# Altium PCB FCM_Integrated.PcbDoc (part 3 of 3)
Units mil, origin at the board's own origin, x right, y up, seen from the top; angles counter-clockwise.
Board outline 5445 x 4366 mil, 4 copper layers (Top Layer, Power, Ground, Bottom Layer), stack 23.756 mil thick; 165 components, 92 nets, 629 pads, 170 vias.
Unrouted connection lines stored in the file: 134.
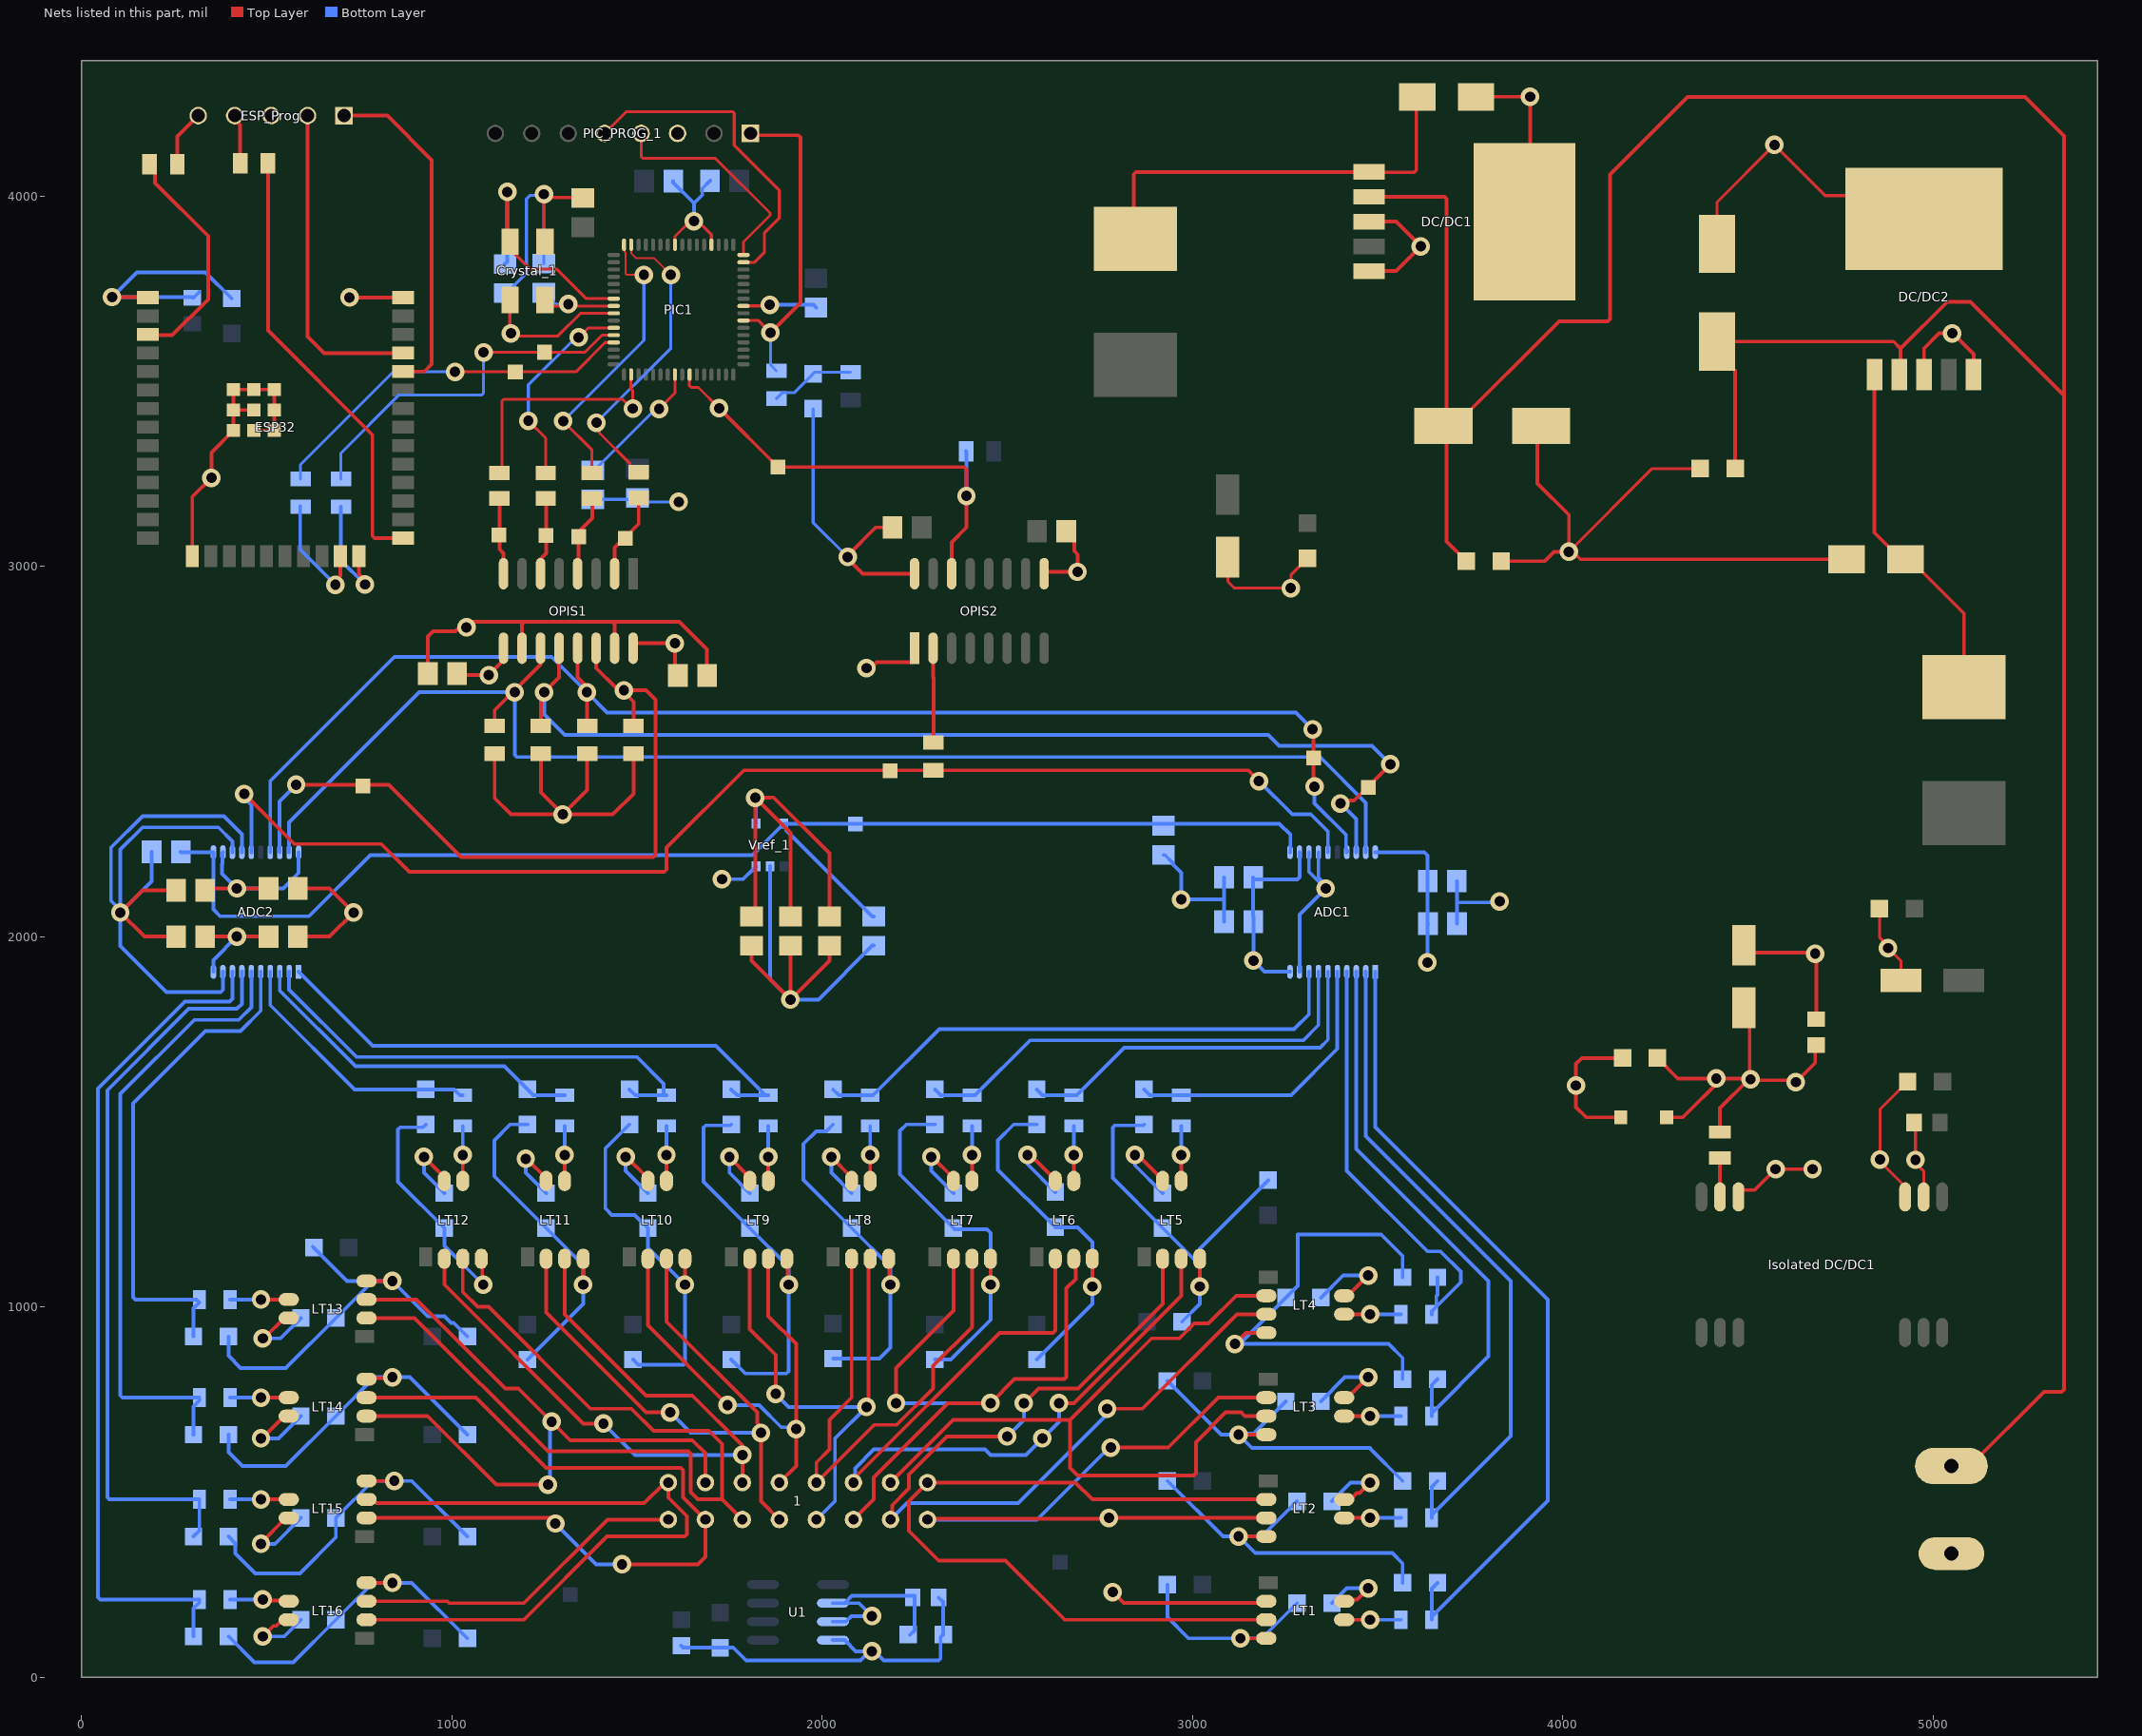
[diagram p4: the nets of this part, all layers, seen from the top]

## Via types
v1: diameter 50, hole 28, Top Layer to Bottom Layer, 170 vias

## Nets (pads, with @x,y where several pads share a name; then routed paths per layer and width w, separated by ;. In a path a pad name is that pad's centre, name@x,y a point inside that pad or via, vN(x,y) a via of type N, cw(c..) or ccw(c..) an arc to the next point about the centre after c; other vN are vias at no path point) (continued)
+5: *1.1 ADC1.10 ADC1.12 ADC1.20 ADC2.10 ADC2.12 ADC2.20 C1.1 C2.1 C3.2 C4.2 C5.2 C6.2 C10.1 C12.2 C13.2 C14.1 C15.1 C16.2 C17.2 C18.1 C19.1 C23.2 C26.2 C29.2 C32.2 C35.2 C38.2 C41.2 C44.2 C47.2 C49.2 C53.2 C55.2 C59.2 C61.2 C65.2 C67.2 C76.1 C77.1 C78.2 DIODE2.K LT1.7 LT2.7 LT3.7 LT4.7 LT5.7 LT6.7 LT7.7 LT8.7 LT9.7 LT10.7 LT11.7 LT12.7 LT13.7 LT14.7 LT15.7 LT16.7 OPIS1.10 OPIS1.15 OPIS2.1 R5.1 R6.1 R7.1 R8.1 U1.2 U1.3 Vref_1.3 Vref_1.4 | length 10591.2
  Top Layer w10: C15.1@334.37,2000 v1(420,2000) C17.2@505.63,2000 ; C14.1@334.37,2125 339.37,2130 v1(420,2130) C16.2@505.63,2130 ; v1(485,360) 485,362.53 552.47,430 LT15.7@560,430 ; v1(485,645) 487.47,645 547.47,705 LT14.7@560,705 ; v1(490,110) 518.28,138.28 526.46,138.28 543.18,155 LT16.7@560,155 ; v1(490,915) 492.47,915 547.47,970 LT13.7@560,970 ; v1(925,1405) 980,1350.03 LT12.7@980,1340 ; C6.2@935.63,2710 935.63,2810.63 950,2825 1010,2825 1035,2850 1195.86,2850 ; R5.1@1116,2494 1116,2374 1160,2330 v1(1300,2330) ; OPIS1.10@1190,2765 1190,2844.14 1195.86,2850 ; v1(1200,1400) 1202.53,1400 1255,1347.53 LT11.7@1255,1340 ; R6.1@1241,2494 1241,2389 v1(1300,2330) ; R7.1@1366,2494 1366,2396 v1(1300,2330) ; OPIS1.15@1440,2765 1440,2844.14 1434.14,2850 ; v1(1470,1405) 1472.53,1405 1530,1347.53 LT10.7@1530,1340 ; R8.1@1491,2494 1491,2386 1435,2330 v1(1300,2330) ; C5.2@1689.37,2705 1689.37,2775.63 1615,2850 1434.14,2850 ; v1(1750,1405) 1805,1350.03 LT9.7@1805,1340 ; C13.2@1810,2054.37 1820,2064.37 v1(1820,2375) ; C10.1@1915,2054.37 1915,2280 v1(1820,2375) ; C12.2@2020,2054.37 2020,2225 1869.14,2375.86 1860.86,2375.86 1860,2375 v1(1820,2375) ; v1(2025,1405) 2080,1350.03 LT8.7@2080,1340 ; v1(2120,2725) 2130.82,2725 2147.12,2741.3 2242.4,2741.3 2250,2748.9 OPIS2.1@2250,2778.82 ; v1(2295,1405) 2297.53,1405 2355,1347.53 LT7.7@2355,1340 ; v1(2555,1410) 2563.29,1410 2630,1343.29 LT6.7@2630,1340 ; v1(2845,1410) 2853.29,1410 2920,1343.29 LT5.7@2920,1340 ; LT1.7@3410,205 3414.78,209.78 3444.78,209.78 v1(3475,240) ; LT2.7@3410,480 3426.82,480 3443.54,496.72 3451.72,496.72 v1(3480,525) ; LT3.7@3410,755 3420.03,755 v1(3475,810) ; LT4.7@3410,1030 3420.03,1030 v1(3475,1085) ; C78.2@4256.18,1672 4311.18,1617 v1@4430,1617 ; DIODE2.K@4280.94,1512 4325,1512 v1@4430,1617 ; *1.1@4425,1472 4425,1537 v1@4505,1617 ; C77.1@4490,1807.35 4505,1792.36 v1@4505,1617 ; C76.1@4685,1707 4682.05,1704.05 4682.05,1659.05 v1(4630,1607) 4625,1612 4510,1612 v1@4505,1617 ; 1195.86,2850 1434.14,2850 ; v1@4430,1617 v1@4505,1617
  Bottom Layer w10: ADC2.10@356.46,1905 356.46,1936.46 v1(420,2000) ; ADC2.12@382.05,2227.83 381.1,2226.88 381.1,2196.1 380,2195 380,2170 v1(420,2130) 545,2130 586.77,2171.77 ADC2.20@586.77,2227.83 ; v1(485,360) 522.76,360 C61.2@592.76,430 ; v1(485,645) 532.76,645 C55.2@592.76,705 ; v1(490,110) 547.76,110 C67.2@592.76,155 ; v1(490,915) 537.76,915 C49.2@592.76,970 ; v1(925,1405) 925,1362.24 C65.2@980,1307.24 ; v1(1200,1400) 1200,1362.24 C59.2@1255,1307.24 ; v1(1470,1405) 1470,1367.24 C53.2@1530,1307.24 ; v1(1730,2155) 1787,2155 1813.22,2181.22 1815.19,2181.22 1822,2188.03 Vref_1.3@1822,2190 ; v1(1750,1405) 1750,1362.24 C47.2@1805,1307.24 ; v1(1820,2375) 1821,2374 1821,2306 Vref_1.4@1822,2305 ; v1(2025,1405) 2025,1362.24 C44.2@2080,1307.24 ; U1.3@2029.49,150 2064.67,150 2079.67,165 v1(2135,165) 2100,200 U1.2@2060.98,200 ; U1.2@2029.49,200 U1.2@2060.98,200 ; C19.1@2237.76,114.03 2250,126.27 2250,220 2080.98,220 U1.2@2060.98,200 ; v1(2295,1405) 2295,1367.24 C41.2@2355,1307.24 ; v1(2555,1410) 2555,1385 C38.2@2630,1310 ; v1(2845,1410) 2845,1382.24 C35.2@2920,1307.24 ; ADC1.10@3263.82,1905 3251.91,1905 ; ADC1.12@3289.41,2227.83 3289.41,2160.77 3283.55,2154.91 3200.09,2154.91 3184.77,2154.91 3169.46,2154.91 C4.2@3164.37,2160 3164.37,2055 3165,2054.37 v1(3165,1935) 3195,1905 3240,1905 ; C29.2@3347.24,745 3412.24,810 v1(3475,810) ; C32.2@3347.24,1025 3407.24,1085 v1(3475,1085) ; C23.2@3377.24,200 3417.24,240 v1(3475,240) ; C26.2@3377.24,475 3427.24,525 v1(3480,525) ; ADC1.20@3494.13,2227.83 3626.94,2227.83 3635.63,2219.14 C3.2@3635.63,2150 3635.63,2035.63 C1.1@3636.26,2035 3635,2033.74 v1(3635,1930) ; 3240,1905 3251.91,1905 ; 3240,1905 3251.91,1905
  other v1: 4507.5,1614.5 4415,1617 1040,2835
+12: C70.2 C71.1 C79.2 C80.1 DC/DC1.2 DC/DC2.2 J1.1 | length 8846.9
  Top Layer w10: DC/DC1.2@3477,3997.86 3681.14,3997.86 3687,3992 3687,3387.78 C71.1@3678.22,3379 ; C70.2@3739.76,3014 3687,3066.76 3687,3370.22 C71.1@3678.22,3379 ; C79.2@4466.24,3264 4466.24,3528.26 4417,3577.5 C80.1@4417,3607 4894,3607 4913,3588 ; DC/DC2.2@4909.07,3517.92 4913,3521.85 4913,3588 ; J1.1@5050,570.22 5099.21,570.22 5299.99,771 5348.14,771 5354,776.86 5354,3461 ; C71.1@3678.22,3379 3707.72,3379 3990.72,3662 4122.14,3662 4128,3667.86 4128,4058 4337,4267 5249,4267 5354,4162 5354,3461 ; 4913,3588 5039,3714 5101,3714 5354,3461
CathH1: OPIS1.2 pad.1@1469,3075 R4.1 | length 245.7
  Top Layer w10: OPIS1.2@1440,2966.18 1440,3050 1505,3115 R4.1@1505,3185
CathH2: OPIS1.4 pad.1@1343,3080 R3.1 | length 233.7
  Top Layer w10: OPIS1.4@1340,2966.18 1342.91,2969.09 1342.91,3092.91 1380,3130 1380,3181.85 R3.1@1378.94,3182.91
CathH3: OPIS1.6 pad.1@1255,3083 R2.1 | length 223.4
  Top Layer w10: OPIS1.6@1240,2966.18 1240,3020 1255,3035 1255,3181.85 R2.1@1253.94,3182.91
CathH4: OPIS1.8 pad.1@1128,3084 R1.1 | length 221.3
  Top Layer w10: R1.1@1128.94,3182.91 1128.94,3046.06 1140,3035 OPIS1.8@1140,2966.18
CathL1: OPIS2.2 R11.2 | length 255.2
  Top Layer w10: OPIS2.2@2300,2778.82 2300,2700 2301,2699 R11.2@2301,2524
Cell_1_Voltage: ADC1.1 C24.2 R16.2 | length 2171.6
  Bottom Layer w10: ADC1.1@3494.13,1905 3494.13,1485.87 3960,1020 3960,476.54 R16.2@3646.34,162.87 ; R16.2@3646.34,155 R16.2@3646.34,162.87 ; C24.2@3662.24,255 3646.34,239.09 R16.2@3646.34,162.87
Cell_2_Voltage: ADC1.2 C27.2 R17.2 | length 1824.4
  Bottom Layer w10: ADC1.2@3468.54,1905 3468.54,1461.46 3860,1070 3860,651.54 R17.2@3646.34,437.87 ; R17.2@3646.34,430 R17.2@3646.34,437.87 ; C27.2@3662.24,530 3646.34,514.09 R17.2@3646.34,437.87
Cell_3_Voltage: ADC1.3 C30.2 R18.2 | length 1510.3
  Bottom Layer w10: ADC1.3@3442.95,1905 3442.95,1427.05 3800,1070 3800,866.54 R18.2@3646.34,712.87 ; R18.2@3646.34,705 R18.2@3646.34,712.87 ; C30.2@3662.24,805 3646.34,789.09 R18.2@3646.34,712.87
Cell_4_Voltage: ADC1.4 C33.2 R19.2 | length 1186.2
  Bottom Layer w10: ADC1.4@3417.36,1905 3417.36,1367.64 3635,1150 3670,1150 3725,1095 3725,1066.54 R19.2@3659.05,1000.59 ; R19.2@3646.34,980 3646.34,987.87 R19.2@3659.05,1000.59 ; C33.2@3662.24,1080 3662.24,1032.58 3659.05,1029.39 R19.2@3659.05,1000.59
Cell_5_Voltage: ADC1.5 C36.2 R20.2 | length 788.5
  Bottom Layer w10: C36.2@2870,1587.24 2885.91,1571.34 R20.2@2970,1571.34 3266.34,1571.34 3391.77,1696.77 ADC1.5@3391.77,1905
Cell_6_Voltage: ADC1.6 C39.2 R21.2 | length 1038.7
  Bottom Layer w10: C39.2@2580,1587.24 2595.91,1571.34 R21.2@2680,1571.34 2687.87,1571.34 2816.54,1700 3345,1700 3366.18,1721.18 ADC1.6@3366.18,1905
Cell_7_Voltage: ADC1.7 C42.2 R22.2 | length 1264.8
  Bottom Layer w10: C42.2@2305,1587.24 2320.91,1571.34 R22.2@2405,1571.34 2412.87,1571.34 2561.54,1720 3299.73,1720 3340.59,1760.86 ADC1.7@3340.59,1905
Cell_8_Voltage: ADC1.8 C45.2 R23.2 | length 1497.2
  Bottom Layer w10: C45.2@2030,1587.24 2045.91,1571.34 R23.2@2130,1571.34 2137.87,1571.34 2316.54,1750 3275,1750 3315,1790 ADC1.8@3315,1905
Cell_9_Voltage: ADC2.1 C50.2 R24.2 | length 1505.1
  Bottom Layer w10: ADC2.1@586.77,1905 786.77,1705 1713.46,1705 R24.2@1847.13,1571.34 ; C50.2@1755,1587.24 1770.91,1571.34 R24.2@1847.13,1571.34 ; R24.2@1855,1571.34 R24.2@1847.13,1571.34
Cell_10_Voltage: ADC2.2 C56.2 R26.2 | length 1302.3
  Bottom Layer w10: ADC2.2@561.18,1905 561.18,1857.1 743.28,1675 1500,1675 1572.13,1602.87 R26.2@1572.13,1571.34 ; C56.2@1480,1587.24 1495.91,1571.34 R26.2@1572.13,1571.34 ; R26.2@1580,1571.34 R26.2@1572.13,1571.34
Cell_11_Voltage: ADC2.3 C62.2 R28.2 | length 937.3
  Bottom Layer w10: ADC2.3@535.59,1905 535.59,1854.41 740,1650 1142.24,1650 1220.91,1571.34 R28.2@1305,1571.34
Cell_12_Voltage: ADC2.4 C68.2 R30.2 | length 710.9
  Bottom Layer w10: ADC2.4@510,1905 510,1815 737.76,1587.24 C68.2@930,1587.24 1006.22,1587.24 1022.13,1571.34 R30.2@1030,1571.34
Cell_13_Voltage: ADC2.5 C51.2 R25.2 | length 1360.5
  Bottom Layer w10: C51.2@302.76,920 302.76,996.22 318.66,1012.13 310.79,1020 145.86,1020 140,1025.86 140,1550 335,1745 430,1745 484.41,1799.41 ADC2.5@484.41,1905
Cell_14_Voltage: ADC2.6 C57.2 R27.2 | length 1683.7
  Bottom Layer w10: C57.2@302.76,655 302.76,731.22 318.66,747.13 R27.2@318.66,755 110.86,755 105,760.86 105,1575 305,1775 425,1775 458.82,1808.82 ADC2.6@458.82,1905
Cell_15_Voltage: ADC2.7 C63.2 R29.2 | length 2003.4
  Bottom Layer w10: C63.2@302.76,380 318.66,395.91 R29.2@318.66,480 75.86,480 70,485.86 70,1585 290,1805 420,1805 433.23,1818.23 ADC2.7@433.23,1905
Cell_16_Voltage: ADC2.8 C69.2 R31.2 | length 2292.3
  Bottom Layer w10: C69.2@302.76,110 302.76,186.22 318.66,202.13 R31.2@318.66,210 50.86,210 45,215.86 45,1590 280,1825 400,1825 407.64,1832.64 ADC2.8@407.64,1905
Chipsel1_HS: ADC1.18 OPIS1.12 pad.1@3475,2403 R6.2 | length 2944.7
  Top Layer w10: R6.2@1241,2569 1241,2651 v1(1250,2660) 1290,2700 OPIS1.12@1290,2765 ; v1(3400.22,2359.78) 3407.88,2367.43 3436.88,2367.43 v1(3534.72,2465.28)
  Bottom Layer w10: v1(1250,2660) 1250,2600 1305,2545 3205,2545 3235,2515 3485,2515 v1(3534.72,2465.28) ; v1(3400.22,2359.78) 3442.95,2317.05 ADC1.18@3442.95,2227.83
Chipsel1_LS: PIC1.43 R2.2 | length 552
  Top Layer w8: v1(1207,3393) 1253.94,3346.06 R2.2@1253.94,3251.81 ; v1(1343,3618) 1343.38,3618 1369.35,3643.97 PIC1.43@1437.58,3643.97
  Bottom Layer w8: v1(1207,3393) 1207,3490 1335,3618 v1(1343,3618)
Chipsel2_HS: ADC2.18 OPIS1.14 pad.1@760,2407 R8.2 | length 2027.7
  Top Layer w10: v1(580,2410) 830,2410 1025,2215 1544.14,2215 1550,2220.86 1550,2640 1525,2665 v1(1465,2665) 1457.35,2672.65 1442.35,2672.65 1390,2725 OPIS1.14@1390,2778.82 ; v1@1462.5,2662.5 1491,2634 R8.2@1491,2569
  Bottom Layer w10: ADC2.18@535.59,2227.83 535,2228.42 535,2365 v1(580,2410)
Chipsel2_LS: PIC1.31 R4.2 | length 822.6
  Top Layer w5: PIC1.31@1484.85,3868.35 1484.85,3845.15 1498,3832 1547,3832 v1(1592,3787)
  Top Layer w8: v1(1391,3388) 1399.04,3379.96 1399.04,3359.86 1481.44,3277.46 1481.44,3269.58 1497.13,3253.9 R4.2@1505,3253.9
  Bottom Layer w8: v1(1391,3388) 1592,3589 v1(1592,3787)
D_CLK_LS: PIC1.50 R1.2 | length 640.4
  Top Layer w8: R1.2@1128.94,3251.81 1136,3258.87 1136,3446.31 1140.69,3451 1461.67,3451 1486.67,3426 v1(1489,3426) 1489,3475 1484,3480 PIC1.50@1484,3501.64
D_In_HS: ADC1.17 ADC2.17 OPIS1.13 pad.1@3327.5,2482.5 R7.2 | length 3806.4
  Top Layer w10: OPIS1.13@1340,2765 1340,2700 1366,2674 R7.2@1366,2569 ; v1(3325,2560) 3327.5,2557.5 3327.5,2407.5 v1(3330,2405)
  Bottom Layer w10: ADC2.17@510,2227.83 510,2420 845,2755 1270,2755 v1(1365,2660) 1420,2605 3280,2605 v1(3325,2560) ; v1(3330,2405) 3330,2360 3415,2275 3415,2235 3420,2230 3419.53,2230 ADC1.17@3417.36,2227.83
D_in_LS: PIC1.32 R3.2 | length 788.7
  Top Layer w5: PIC1.32@1465.17,3868.35 1466.32,3867.2 1466.32,3850.68 1469.5,3847.5 1469.5,3789.93 1472.43,3787 v1(1519,3787)
  Top Layer w8: v1(1301,3392) 1378.94,3314.06 R3.2@1378.94,3251.81
  Bottom Layer w8: v1(1301,3392) 1519,3610 v1(1519,3787)
D_out_HS: ADC1.15 ADC2.15 pad.1@2184,2448 R11.1 | length 3450.7
  Top Layer w10: v1(440,2385) 575,2250 810,2250 885,2175 1574.14,2175 1580,2180.86 1580,2240 1789,2449 3151,2449 v1(3180,2420)
  Bottom Layer w10: v1(440,2385) 440,2374.18 458.82,2355.36 ADC2.15@458.82,2227.83 ; v1(3180,2420) 3270,2330 3320,2330 3366.18,2283.82 ADC1.15@3366.18,2227.83
D_out_L: OPIS2.14 pad.1@1881,3268 PIC1.58 R9.1 | length 1278.1
  Top Layer w8: PIC1.58@1642,3504.26 1642,3487.69 1646.69,3483 1666,3483 v1(1722,3427)
  Top Layer w10: v1(1722,3427) pad.1@1881,3268 2384.14,3268 2390,3262.14 v1(2390,3190) 2390,3105 2350,3065 OPIS2.14@2350,2980
  Bottom Layer w10: R9.1@2389,3311 2390,3310 v1(2390,3190)
DCLK_HS: ADC1.19 ADC2.19 OPIS1.11 R5.2 | length 3737.5
  Top Layer w10: R5.2@1116,2569 1116,2611 1240,2735 OPIS1.11@1240,2765
  Bottom Layer w10: ADC2.19@561.18,2227.83 561.18,2308.82 912.36,2660 v1(1170,2660) 1170,2490.86 1175.86,2485 3345,2485 3468.54,2361.46 ADC1.19@3468.54,2227.83
ESP_Boot_D: ESP32.25 R32.1 | length 1208.4
  Top Layer w10: R32.1@504,4088 504,3637 786,3355 786,3081.86 791.86,3076 ESP32.25@869,3076
ESP_Boot_P: ESP_Prog.4 R32.2 | length 135.2
  Top Layer w10: ESP_Prog.4@414,4217 414,4206.92 429,4191.92 R32.2@429,4088
ESP_Enable_D: ESP32.3 R15.2 | length 633.4
  Top Layer w10: ESP32.3@180.02,3626 182.02,3624 245,3624 342,3721 342,3892 198.69,4035.31 198.69,4071.31 R15.2@184,4086
ESP_Enable_P: ESP_Prog.5 R15.1 | length 154.4
  Top Layer w10: R15.1@259,4086 259,4160.43 ESP_Prog.5@315.57,4217
ESP_TX_BOOT: ESP32.35 ESP_Prog.2 | length 874.1
  Top Layer w10: ESP_Prog.2@610.85,4217 610.85,3620.15 656,3575 868,3575 ESP32.35@869,3576
ESPout-PICin: pad.1@1251,3578 PIC1.44 R10.2 | length 1003.1
  Top Layer w8: v1(1086,3578) 1360,3578 1406.26,3624.26 PIC1.44@1437.61,3624.26
  Bottom Layer w8: R10.2@701,3236 701,3306 858,3463 1081.31,3463 1086,3467.69 v1(1086,3578)
GND: 
GND_H: "Isolated DC/DC1.4" ADC1.9 ADC1.13 ADC1.14 ADC2.9 ADC2.13 ADC2.14 C1.2 C2.2 C3.1 C4.1 C5.1 C6.1 C10.2 C11.1 C12.1 C13.1 C14.2 C15.2 C16.1 C17.1 C18.2 C19.2 C20.1 C21.2 C22.1 C23.1 C24.1 C25.1 C26.1 C27.1 C28.1 C29.1 C30.1 C31.1 C32.1 C33.1 C34.1 C35.1 C36.1 C37.1 C38.1 C39.1 C40.1 C41.1 C42.1 C43.1 C44.1 C45.1 C46.1 C47.1 C48.1 C49.1 C50.1 C51.1 C52.1 C53.1 C54.1 C55.1 C56.1 C57.1 C58.1 C59.1 C60.1 C61.1 C62.1 C63.1 C64.1 C65.1 C66.1 C67.1 C68.1 C69.1 C76.2 C77.2 C78.1 C93.1 C94.1 DIODE2.A LT1.2 LT1.4 LT2.4 LT3.4 LT4.4 LT5.4 LT6.4 LT7.4 LT8.4 LT9.4 LT10.4 LT11.4 LT12.4 LT13.4 LT14.4 LT15.4 LT16.4 OPIS1.9 OPIS1.16 U1.4 Vref_1.2 | length 23408.9
  Top Layer w10: C15.2@255.63,2000 170,2000 v1(105,2065) 165,2125 C14.2@255.63,2125 ; C17.1@584.37,2000 670,2000 v1(735,2065) 670,2130 C16.1@584.37,2130 ; LT16.4@770,255 v1(840,255) ; LT15.4@770,530 v1(845,530) ; LT14.4@770,805 772.5,807.5 837.5,807.5 v1(840,810) ; LT13.4@770,1070 v1(840,1070) ; C6.1@1014.37,2710 1018.37,2706 v1(1100,2706) 1140,2746 OPIS1.9@1140,2778.82 ; LT12.4@1080,1130 1082.5,1127.5 1082.5,1062.5 v1(1085,1060) ; v1(1355,1060) LT11.4@1355,1130 ; OPIS1.16@1490,2778.82 1490,2784.98 1497.02,2792 v1(1603,2792) 1603,2712.63 C5.1@1610.63,2705 ; v1(1630,1060) LT10.4@1630,1130 ; C13.1@1810,1975.63 1810,1935 v1(1915,1830) ; LT9.4@1905,1130 1907.5,1127.5 1907.5,1062.5 v1(1910,1060) ; C10.2@1915,1975.63 v1(1915,1830) ; C12.1@2020,1975.63 2020,1935 v1(1915,1830) ; LT8.4@2180,1130 2182.5,1127.5 2182.5,1062.5 v1(2185,1060) ; v1(2455,1060) LT7.4@2455,1130 ; v1(2730,1055) LT6.4@2730,1130 ; v1(2785,230) 2814.78,200.22 3195.22,200.22 LT1.2@3200,205 ; v1(3020,1055) LT5.4@3020,1130 ; v1(3115,900) 3145,930 LT4.4@3200,930 ; v1(3125,380) LT2.4@3200,380 ; v1(3125,655) LT3.4@3200,655 ; v1(3130,105) LT1.4@3200,105 ; DIODE2.A@4156.93,1512 4063.86,1512 4036,1539.86 4036,1656.28 4051.72,1672 C78.1@4161.69,1672 ; 4475,1297 4475,1305.69 4484.93,1315.62 4518.62,1315.62 v1(4575,1372) v1(4675,1372) ; C77.2@4490,1976.65 4509.65,1957 4679.14,1957 4685,1951.14 C76.2@4685,1777
  Bottom Layer w10: C94.1@189.63,2229 189.63,2149.63 v1(105,2065) ; ADC2.9@382.05,1905 382.05,1855.86 376.19,1850 230,1850 105,1975 v1(105,2065) ; C69.1@397.24,110 467.24,40 572.24,40 C67.1@687.24,155 787.24,255 v1(840,255) 892.24,255 C66.1@1042.24,105 ; C63.1@397.24,380 415.87,361.38 415.87,334.13 470,280 590,280 687.24,377.24 C61.1@687.24,430 787.24,530 v1(845,530) 892.24,530 C60.1@1042.24,380 ; C57.1@397.24,655 397.24,607.76 435,570 552.24,570 C55.1@687.24,705 792.24,810 v1(840,810) 887.24,810 C54.1@1042.24,655 ; C51.1@397.24,920 397.24,867.76 430,835 552.24,835 C49.1@687.24,970 787.24,1070 ; ADC2.13@407.64,2227.83 407.64,2257.36 370,2295 165,2295 105,2235 v1@105,2071.57 ; ADC2.14@433.23,2227.83 433.23,2276.77 385,2325 165,2325 80,2240 80,2096.57 v1@105,2071.57 ; C64.1@625,1162.76 C64.1@627.76,1160 717.76,1070 787.24,1070 ; C68.1@930,1492.76 922.24,1485 860.86,1485 855,1479.14 855,1337.76 C65.1@980,1212.76 980,1165 v1(1085,1060) ; C48.1@1042.24,920 1005.43,956.81 998.19,956.81 980,975 935,975 v1(840,1070) 787.24,1070 ; C58.1@1205,857.76 1355,1007.76 v1(1355,1060) 1355,1112.76 C59.1@1255,1212.76 1115,1352.76 1115,1450 1157.76,1492.76 C62.1@1205,1492.76 ; C56.1@1480,1492.76 1415,1427.76 1415,1265.86 1432.24,1248.62 1494.14,1248.62 C53.1@1530,1212.76 1530,1160 v1(1630,1060) 1630,850 1630.86,849.14 1625.86,844.14 1503.61,844.14 C52.1@1490,857.76 ; C21.2@1620,85 1625.25,79.75 C20.1@1725,79.75 1760.25,79.75 1795,45 2103.43,45 v1@2128.43,70 ; C46.1@1755,857.76 1792.76,820 1904.14,820 1910,825.86 v1(1910,1060) 1910,1107.76 C47.1@1805,1212.76 1680,1337.76 1680,1484.14 1685.86,1490 1752.24,1490 C50.1@1755,1492.76 ; Vref_1.2@1860,2190 1860,1885 v1(1915,1830) 1990.43,1830 2136.06,1975.63 C11.1@2140,1975.63 ; U1.4@2029.49,100 2060.98,100 2090.98,70 v1@2128.43,70 ; C43.1@2030,860.51 2155.51,860.51 2185,890 v1(2185,1060) 2185,1107.76 C44.1@2080,1212.76 1950,1342.76 1950,1440 1984.13,1474.13 2011.38,1474.13 C45.1@2030,1492.76 ; C40.1@2305,857.76 2347.76,857.76 2455,965 v1(2455,1060) 2455,1200 2445,1210 2357.76,1210 C41.1@2355,1212.76 2210,1357.76 2210,1475 2227.76,1492.76 C42.1@2305,1492.76 ; C18.2@2315,215 2327.24,202.76 C19.2@2327.24,115 2320,107.76 2320,50.86 2314.14,45 2166.57,45 2141.57,70 v1(2135,70) v1@2128.43,70 ; C37.1@2580,857.76 2730,1007.76 v1(2730,1055) 2730,1175 2690,1215 2630.51,1215 C38.1@2630,1215.51 2475,1370.51 2475,1450 2517.76,1492.76 C39.1@2580,1492.76 ; C36.1@2870,1492.76 2867.24,1490 2790.86,1490 2785,1484.14 2785,1347.76 C35.1@2920,1212.76 3020,1112.76 ; C93.1@2922,2220.63 2925.94,2220.63 2947.51,2199.06 2947.51,2195.12 2970,2172.63 v1(2970,2100) 3085.63,2100 ; C22.1@2932.76,250 2932.76,162.24 2990,105 v1(3130,105) 3187.76,105 C23.1@3282.76,200 ; C25.1@2932.76,530 3082.76,380 v1(3125,380) ; C28.1@2932.76,800 3077.76,655 v1(3125,655) ; C34.1@2972.24,960 3020,1007.76 v1(3020,1055) 3020,1112.76 ; C2.2@3085.63,2040 3085.63,2100 ; C4.1@3085.63,2160 3085.63,2100 ; C31.1@3205,1342.24 3020,1157.24 3020,1112.76 ; C29.1@3252.76,745 3165,657.24 3127.24,657.24 v1(3125,655) ; C26.1@3282.76,475 3187.76,380 v1(3125,380) ; ADC1.9@3289.41,1905 3289.41,2059.41 v1(3360,2130) ; ADC1.13@3315,2227.83 3315,2175 v1(3360,2130) ; ADC1.14@3340.59,2227.83 3340.59,2160.23 3360,2140.82 v1(3360,2130) ; C24.1@3567.76,255 3567.76,307.24 3540,335 3170,335 v1(3125,380) ; C27.1@3567.76,530 3480,617.76 3480,619.14 3160.86,619.14 v1(3125,655) ; C30.1@3567.76,805 3567.76,862.24 3530,900 v1(3115,900) 3122.65,907.65 3135.41,907.65 3285,1057.24 3285,1195 3510,1195 3567.76,1137.24 C33.1@3567.76,1080 ; C3.1@3714.37,2150 3715,2149.37 3715,2092.18 ; C1.2@3715,2035 3715,2092.18 ; v1(3830,2095) 3827.18,2092.18 3715,2092.18 ; v1(105,2065) v1@105,2071.57
  other v1: 4036,1598 4682.07,1954.07
GND_L: "Isolated DC/DC1.2" "Isolated DC/DC1.3" C7.2 C8.1 C9.1 C70.1 C71.2 C72.2 C73.1 C74.2 C75.1 C79.1 C80.2 C81.2 C82.1 C83.2 C84.2 C85.2 C86.2 C87.1 C88.2 C89.1 C90.1 C91.2 C92.1 Crystal_1.2 Crystal_1.4 DC/DC1.3 DC/DC1.5 DC/DC1.6 DC/DC2.3 DC/DC2.5 DC/DC2.6 DIODE1.A DIODE3.A ESP32.1 ESP32.15 ESP32.38 ESP32.39 ESP_Prog.3 J1.2 OPIS2.9 OPIS2.16 PIC1.9 PIC1.20 PIC1.25 PIC1.41 PIC_PROG_1.3 | length 9561.7
  Top Layer w8: Crystal_1.2@1156.76,3718.07 1156.76,3706.26 1157,3706.02 1157,3649.69 v1@1161.69,3645 ; v1(1160,3629) 1167,3622 1287,3622 1348.32,3683.32 PIC1.41@1437.61,3683.32 ; v1@1243,3999 v1(1249,4005) ; Crystal_1.4@1251.24,3863.74 1249,3865.98 v1(1249,4005) ; C92.1@1349.49,3989.51 1343,3996 1261.43,3996 1252.43,4005 v1(1249,4005) ; PIC1.25@1602.96,3868.35 1603.13,3868.53 1603.13,3891.13 1644,3932 v1(1654,3932) 1665,3932 1701.39,3895.61 PIC1.20@1701.39,3868.35 ; PIC1.9@1788,3703 1788.17,3703.17 1856.17,3703.17 v1(1859,3706) ; C72.2@3096,3024.36 3096,2959 3114,2941 v1(3266,2941) 3267.24,2942.24 3267.24,2978 C73.1@3311,3021.76 ; v1(4017,3039) 4242,3264 C79.1@4371.76,3264 ; C80.2@4417,3870.78 4417,3983 v1(4572,4138) 4709,4001 4913,4001 DC/DC2.6@4976,3938 ; C82.1@4855.76,2075 4855.76,1998.08 4879,1974.84 v1(4879,1969) 4913.71,1934.29 C81.2@4913.71,1882 ; 4925,1297 4925,1325.31 4857,1393.31 v1(4857,1398) 4857,1533.18 C75.1@4931.82,1608 ; C74.2@4949.06,1498 4953,1494.06 v1(4953,1397) 4953,1388.67 4975,1366.67 4975,1297
  Top Layer w10: v1(83,3727) 179.02,3727 ESP32.1@180.02,3726 ; ESP32.15@299.51,3026.79 299.51,3187.51 v1(351,3239) 351,3307.61 ESP32.39@410.34,3366.94 ESP32.39@410.34,3422.06 ; ESP32.39@465.46,3366.94 ESP32.39@520.57,3366.94 ESP32.39@520.57,3422.06 ESP32.39@520.57,3477.18 ESP32.39@465.46,3477.18 ESP32.39@410.34,3477.18 ESP32.39@410.34,3422.06 ; ESP32.39@465.46,3422.06 ESP32.39@410.34,3422.06 ; v1(724,3726) ESP32.38@869,3726 ; C9.1@2190.63,3105 2145,3105 2069.14,3029.14 v1(2069.14,3025) 2069.14,3020.86 2110,2980 OPIS2.16@2250,2980 ; OPIS2.9@2600,2980 2605,2985 v1(2690,2985) 2690,3031.96 2680.94,3041.01 2680.94,3073.43 C8.1@2659.37,3095 ; DC/DC1.5@3477,3797.07 3550.07,3797.07 v1(3617,3864) 3550.07,3930.93 DC/DC1.3@3477,3930.93 ; DIODE1.A@3766,4267 3767,4268 v1(3912,4268) ; C70.1@3834.24,3014 3952,3014 3977,3039 v1(4017,3039) ; DC/DC1.6@3897.08,3930.93 3912,3945.85 3912,4266 v1@3911,4267 ; C71.2@3942,3379 3932,3369 3932,3224 4017,3139 v1(4017,3039) ; DIODE3.A@4771.8,3023.8 DIODE3.A@4767,3019 4047.82,3019 4027.82,3039 v1(4017,3039) ; DC/DC2.3@4976,3517.92 4976,3588.14 5016.86,3629 5054,3629 5109.86,3573.14 DC/DC2.5@5109.86,3517.92
  Bottom Layer w8: C87.1@1144.02,3737.63 1147.95,3737.63 1202,3791.68 1202,3992 1212,4002 1246,4002 v1(1249,4005) C86.2@1249.02,3817.37 ; C88.2@1381,3180.63 1498,3180.63 C89.1@1502,3184.63 1512.63,3174 v1(1613,3174) ; C84.2@1976,3425.51 1976,3118.14 v1(2069.14,3025)
  Bottom Layer w10: C83.2@318.62,3740.67 302.95,3725 C83.2@300,3725 298,3727 v1(83,3727) 150,3794 335.24,3794 C7.2@406,3723.24 ; C90.1@1598.37,4040 1598.37,4036.06 1654,3980.43 ; v1(1654,3932) 1654,3980.43 ; C91.2@1697.63,4041 1676.95,4020.32 1676.95,4003.38 1654,3980.43 ; v1(1859,3706) 1976.63,3706 C85.2@1984,3698.63
  other v1: 5052,3629
MCLR: PIC1.7 PIC_PROG_1.1 R14.2 | length 896.7
  Top Layer w8: PIC1.7@1788,3663.63 1828.37,3663.63 v1(1861,3631)
  Top Layer w10: PIC_PROG_1.1@1806.85,4169 1811.85,4164 1936.14,4164 1942,4158.14 1942,3712 v1(1861,3631)
  Bottom Layer w8: v1(1861,3631) 1861,3543.69 1876.69,3528 R14.2@1877,3528
Net1_1: 1.1 LT1.3 LT2.2 | length 2149.7
  Top Layer w10: LT1.3@3200,155 2655.67,155 2495.67,315 2315,315 2235,395 2235,475.67 1.1@2285,525.67 2684.33,525.67 2730,480 LT2.2@3200,480
Net1_2: 1.2 LT2.3 LT3.2 | length 1983.5
  Top Layer w10: 1.2@2285,425.67 2287.17,427.84 2772.84,427.84 v1(2775,430) LT2.3@3200,430 ; v1(2780,620) 2935,620 3070,755 LT3.2@3200,755
  Bottom Layer w10: 1.2@2287.17,427.84 1.2@2285,425.67 2580.67,425.67 v1@2785,630 ; v1@2772.84,427.84 v1(2775,430)
Net1_3: 1.3 LT3.3 LT4.2 | length 2016
  Top Layer w10: 1.3@2185,525.67 2354.33,695 2670,695 ; LT3.3@3200,705 3141.59,705 3131.59,715 3090,715 3010,635 3010,550.86 3004.14,545 2690,545 2670,565 2670,695 ; LT4.2@3200,1030 3118.65,1030 3043.65,955 3005,955 2965,915 2890,915 2670,695
Net1_4: 1.4 LT4.3 LT5.2 | length 2429.8
  Top Layer w10: 1.4@2185,425.67 2189.29,429.96 2189.29,464.29 2235,510 2235,547.39 2337.61,650 v1(2500,650) ; v1(2545,740) 2585,780 2691.72,780 2920,1008.28 LT5.2@2920,1130 ; v1(2770,725) 2865,725 3120,980 LT4.3@3200,980
  Bottom Layer w10: 1.4@2185,425.67 2229.33,470 2530,470 2770,710 v1(2770,725) v1@2770,735 ; v1(2500,650) 2545,695 v1(2545,740)
Net1_5: 1.5 LT5.3 LT6.2 | length 2170.2
  Top Layer w10: 1.5@2085,525.67 2085,535 2480,930 2624.14,930 2630,935.86 LT6.2@2630,1130 ; v1(2640,740) 2680,740 2970,1030 LT5.3@2970,1130
  Bottom Layer w10: 1.5@2085,525.67 2089.29,529.96 2089.29,564.29 2140,615 2440,615 2455,600 2550,600 v1(2595,645) 2640,690 v1(2640,740)
Net1_6: 1.6 LT6.3 LT7.2 | length 1810.1
  Top Layer w10: 1.6@2085,425.67 2140,480.67 2140,540 2340,740 v1(2455,740) 2520,805 2654.14,805 2660,810.86 2660,1050 2685,1075 2685,1088.18 2684.78,1088.39 2684.78,1125.22 LT6.3@2680,1130 ; v1(2200,740) 2200,835 2355,990 LT7.2@2355,1130
  Bottom Layer w10: v1(2200,740) v1(2455,740)
Net1_7: 1.7 LT7.3 LT8.2 | length 1457.5
  Top Layer w10: LT8.2@2080,1130 2080,755 2020,695 2020,615 1985,580 1.7@1985,525.67 2140.71,681.38 2201.38,681.38 2300,780 2300,840.67 2405,945.67 LT7.3@2405,1130
Net1_8: 1.8 LT8.3 LT9.2 | length 1417.9
  Top Layer w10: LT9.2@1805,1130 1805,940 1875,870 v1(1875,765) ; v1(2120,730) 2125.22,735.22 2125.22,1125.22 LT8.3@2130,1130
  Bottom Layer w10: v1(1875,765) 1910,730 v1(2120,730) 2035,645 2035,475.67 1.8@1985,425.67
Net1_9: 1.9 LT9.3 LT10.2 | length 1350
  Top Layer w10: LT10.2@1530,1130 1530,950 v1(1745,735) ; LT9.3@1855,1130 1855,975 1930,900 v1(1930,670) 1930,570.67 1.9@1885,525.67
  Bottom Layer w10: v1(1745,735) 1830,735 1890,675 1925,675 v1(1930,670)
Net1_10: 1.10 LT10.3 LT11.2 | length 1690.3
  Top Layer w10: LT11.2@1255,1130 1255,985 1525,715 v1(1590,715) ; LT10.3@1580,1130 1580,960 1825,715 1825,685.86 1827.35,683.51 1827.35,667.65 v1(1835,660) 1835,475.67 1.10@1885,425.67
  Bottom Layer w10: v1(1590,715) 1645,660 v1(1835,660)
Net1_11: 1.11 LT11.3 LT12.2 | length 1941.9
  Top Layer w10: LT12.2@980,1130 980,1060 1355,685 v1(1410,685) ; LT11.3@1305,1130 1305,980 1525,760 1650,760 1785,625 v1(1785,600) 1.11@1785,525.67
  Bottom Layer w10: v1(1410,685) 1495,600 v1(1785,600)
Net1_12: 1.12 LT12.3 LT13.2 | length 2410.6
  Top Layer w10: LT13.2@770,970 900,970 1260,610 1639.14,610 1645,604.14 1645,500 1664.33,480.67 1730,480.67 ; LT12.3@1030,1130 1030,1040 1070,1000 1100,1000 1375,725 1485,725 1545,665 1695,665 1730,630 1730,480.67 ; 1.12@1785,425.67 1730,480.67
Net1_13: 1.13 LT13.3 LT14.2 | length 1907
  Top Layer w10: LT14.2@770,705 935,705 1120,520 v1(1260,520) ; LT13.3@770,1020 905,1020 1145,780 1180,780 1320,640 1650,640 1685,605 1.13@1685,525.67
  Bottom Layer w10: v1(1260,520) 1265,525 1265,685 v1(1270,690)
Net1_14: 1.14 LT14.3 LT15.2 | length 2170.2
  Top Layer w10: LT15.2@770,430 1265,430 v1(1280,415) ; LT14.3@770,755 1065,755 1255,565 1619.14,565 1625,559.14 1625,485.67 1.14@1685,425.67 1685,325 1665,305 v1(1460,305)
  Bottom Layer w10: v1(1280,415) 1390,305 v1(1460,305)
Net1_15: 1.15 LT15.3 LT16.2 | length 1963.3
  Top Layer w10: LT16.2@770,155 1195,155 1420,380 1629.14,380 1635,385.86 1635,435 1585,485 1.15@1585,525.67 1575.67,525.67 1520,470 796.82,470 786.82,480 LT15.3@770,480
Net1_16: 1.16 LT16.3 | length 910.5
  Top Layer w10: LT16.3@770,205 988.41,205 993.41,200 1195,200 1420.67,425.67 1.16@1585,425.67
Net*1_2: "Isolated DC/DC1.5" *1.2 | length 113.6
  Top Layer w10: 4425,1297 *1.2@4425,1402 *1.2@4431.06,1395.94
NetC84_1: C84.1 R13.1 R14.1 | length 229.4
  Bottom Layer w8: R14.1@1877,3453 1892.69,3468.69 1924.69,3468.69 C84.1@1976,3520 1980,3524 R13.1@2077,3524
NetC86_1: C86.1 Crystal_1.3 PIC1.40 | length 268.4
  Top Layer w8: Crystal_1.3@1251.24,3706.26 1254.5,3703 PIC1.40@1437.61,3703
  Bottom Layer w8: C86.1@1249.02,3738.63 1252.95,3738.63 1275.53,3716.06 1275.53,3712.69 1280.21,3708 v1(1315,3708)
NetC87_2: C87.2 Crystal_1.1 PIC1.39 | length 690.4
  Top Layer w8: Crystal_1.1@1156.76,3863.74 1156.76,3856.93 1210.69,3803 1283,3803 1363.32,3722.68 PIC1.39@1437.61,3722.68
  Top Layer w10: v1(1150,4011) 1150,3870.5 Crystal_1.1@1156.76,3863.74
  Bottom Layer w10: C87.2@1144.02,3816.37 1150,3822.35 v1(1150,4011)
NetC88_1: C88.1 PIC1.56 | length 358.4
  Top Layer w8: v1(1560,3425) 1603,3468 1603,3517.92 PIC1.56@1602.96,3517.96
  Bottom Layer w8: C88.1@1381,3259.37 1384.94,3259.37 1550.57,3425 v1(1560,3425)
NetDC/DC1_1: DC/DC1.1 DIODE1.K L1.1 | length 1137.3
  Top Layer w10: L1.1@2846,3884 2842,3888 2842,4058.93 2847.86,4064.79 DC/DC1.1@3477,4064.79 ; DC/DC1.1@3477.79,4064 3599.14,4064 3605,4069.86 DIODE1.K@3605,4263.51
NetDC/DC2_1: DC/DC2.1 DIODE3.K L2.1 | length 957.9
  Top Layer w10: DC/DC2.1@4842.14,3517.92 4842.14,3090.79 4913.93,3019 DIODE3.K@4925.74,3019 4937.55,3019 5084,2872.55 L2.1@5084,2674
NetESP32_23: ESP32.23 R12.1 | length 333.8
  Top Layer w10: v1(686,2950) 686,2960.82 699.71,2974.53 ESP32.23@699.71,3026.79
  Bottom Layer w10: R12.1@591,3162 591,3045 v1(686,2950)
NetESP32_24: ESP32.24 R10.1 | length 319.5
  Top Layer w10: ESP32.24@749.71,3026.79 749.71,2978.12 766,2961.82 v1(766,2951)
  Bottom Layer w10: R10.1@701,3161 701,3016 v1(766,2951)
NetESP32_34: ESP32.34 ESP_Prog.1 | length 922.8
  Top Layer w10: ESP_Prog.1@709.28,4217 826.14,4217 946,4097.14 946,3546 926,3526 ESP32.34@869,3526
NetLT1_6: LT1.6 R16.1 | length 153.7
  Top Layer w10: LT1.6@3410,155 v1(3480,155)
  Bottom Layer w10: v1(3480,155) R16.1@3563.66,155
NetLT2_6: LT2.6 R17.1 | length 153.7
  Top Layer w10: LT2.6@3410,430 v1(3480,430)
  Bottom Layer w10: v1(3480,430) R17.1@3563.66,430
NetLT3_6: LT3.6 R18.1 | length 153.7
  Top Layer w10: LT3.6@3410,705 v1(3480,705)
  Bottom Layer w10: v1(3480,705) R18.1@3563.66,705
NetLT4_6: LT4.6 R19.1 | length 153.7
  Top Layer w10: LT4.6@3410,980 v1(3480,980)
  Bottom Layer w10: v1(3480,980) R19.1@3563.66,980
NetLT5_6: LT5.6 R20.1 | length 158.7
  Top Layer w10: LT5.6@2970,1340 v1(2970,1410)
  Bottom Layer w10: v1@2970,1400 v1(2970,1410) R20.1@2970,1488.66
NetLT6_6: LT6.6 R21.1 | length 158.7
  Top Layer w10: LT6.6@2680,1340 v1(2680,1410)
  Bottom Layer w10: v1@2680,1400 v1(2680,1410) R21.1@2680,1488.66
NetLT7_6: LT7.6 R22.1 | length 158.7
  Top Layer w10: LT7.6@2405,1340 v1(2405,1410)
  Bottom Layer w10: v1@2405,1400 v1(2405,1410) R22.1@2405,1488.66
NetLT8_6: LT8.6 R23.1 | length 158.7
  Top Layer w10: LT8.6@2130,1340 v1(2130,1410)
  Bottom Layer w10: v1@2130,1400 v1(2130,1410) R23.1@2130,1488.66
NetLT9_6: LT9.6 R24.1 | length 148.7
  Top Layer w10: LT9.6@1855,1340 v1(1855,1405)
  Bottom Layer w10: v1(1855,1405) R24.1@1855,1488.66
NetLT10_6: LT10.6 R26.1 | length 158.7
  Top Layer w10: LT10.6@1580,1340 v1(1580,1410)
  Bottom Layer w10: v1@1580,1400 v1(1580,1410) R26.1@1580,1488.66
NetLT11_6: LT11.6 R28.1 | length 158.7
  Top Layer w10: LT11.6@1305,1340 v1(1305,1410)
  Bottom Layer w10: v1@1305,1400 v1(1305,1410) R28.1@1305,1488.66
NetLT12_6: LT12.6 R30.1 | length 158.7
  Top Layer w10: LT12.6@1030,1340 v1(1030,1410)
  Bottom Layer w10: v1@1030,1400 v1(1030,1410) R30.1@1030,1488.66
NetLT13_6: LT13.6 R25.1 | length 158.7
  Top Layer w10: v1(485,1020) LT13.6@560,1020
  Bottom Layer w10: R25.1@401.34,1020 v1(485,1020)
NetLT14_6: LT14.6 R27.1 | length 168.7
  Top Layer w10: v1(485,755) LT14.6@560,755
  Bottom Layer w10: R27.1@401.34,755 v1(485,755) v1@495,755
NetLT15_6: LT15.6 R29.1 | length 168.7
  Top Layer w10: v1(485,480) LT15.6@560,480
  Bottom Layer w10: R29.1@401.34,480 v1(485,480) v1@495,480
NetLT16_6: LT16.6 R31.1 | length 160.7
  Top Layer w10: v1(490,210) 492.5,207.5 557.5,207.5 LT16.6@560,205
  Bottom Layer w10: R31.1@401.34,210 v1(490,210)
PGEC1: PIC1.15 PIC_PROG_1.5 | length 886.8
  Top Layer w8: PIC_PROG_1.5@1413.15,4169 1472.15,4228 1758.31,4228 1763,4223.31 1763,4137 1885,4015 1885,3941 1844,3900 1844,3847 1818.11,3821.11 PIC1.15@1788,3821.11
PGED1: PIC1.16 PIC_PROG_1.4 | length 616.8
  Top Layer w8: PIC_PROG_1.4@1511.57,4169 1511.57,4106.69 1516.26,4102 1712,4102 1859.69,3954.31 1859.69,3947.69 1788,3876 PIC1.16@1788,3840.8
PICout-ESPin: pad.1@1171.84,3524.76 PIC1.45 R12.2 | length 1022.8
  Top Layer w8: v1(1009,3525) 1335,3525 1414.4,3604.4 1437.43,3604.4 PIC1.45@1437.61,3604.57 PIC1.45@1437.78,3604.4
  Top Layer w10: v1@1008,3526 v1(1009,3525)
  Bottom Layer w8: R12.2@592,3236 592,3275 842,3525 v1(1009,3525)
V_Ref: ADC1.11 ADC2.11 C11.2 C93.2 C94.2 pad.1@2090,2304 Vref_1.5 | length 3677.5
  Bottom Layer w10: C94.2@268.37,2229 269.54,2227.83 ADC2.11@356.46,2227.83 356.46,2073.54 375,2055 615,2055 780,2220 1812,2220 1888.22,2296.22 1890.19,2296.22 1897,2303.03 Vref_1.5@1897,2305 ; C11.2@2140,2054.37 2136.06,2054.37 1903.81,2286.62 1903.81,2298.19 Vref_1.5@1897,2305 ; ADC1.11@3263.82,2227.83 3264.77,2228.78 3264.77,2261.35 3265,2261.58 3265,2275 3235,2305 Vref_1.5@1897,2305
pads on no net: "Isolated DC/DC1.6" "Isolated DC/DC1.7" "Isolated DC/DC1.8" "Isolated DC/DC1.9" "Isolated DC/DC1.10" "Isolated DC/DC1.11" "Isolated DC/DC1.12" ADC1.16 ADC2.16 ESP32.4 ESP32.5 ESP32.7 ESP32.8 ESP32.9 ESP32.10 ESP32.11 ESP32.12 ESP32.13 ESP32.14 ESP32.16 ESP32.17 ESP32.18 ESP32.19 ESP32.20 ESP32.21 ESP32.22 ESP32.26 ESP32.27 ESP32.28 ESP32.29 ESP32.30 ESP32.31 ESP32.32 ESP32.33 ESP32.36 ESP32.37 OPIS2.3 OPIS2.4 OPIS2.5 OPIS2.6 OPIS2.7 OPIS2.8 OPIS2.11 OPIS2.12 OPIS2.13 PIC1.1 PIC1.2 PIC1.3 PIC1.4 PIC1.5 PIC1.6 PIC1.8 PIC1.11 PIC1.12 PIC1.13 PIC1.14 PIC1.17 PIC1.18 PIC1.21 PIC1.22 PIC1.23 PIC1.24 PIC1.27 PIC1.28 PIC1.29 PIC1.30 PIC1.33 PIC1.34 PIC1.36 PIC1.37 PIC1.42 PIC1.46 PIC1.47 PIC1.48 PIC1.49 PIC1.51 PIC1.52 PIC1.53 PIC1.54 PIC1.55 PIC1.59 PIC1.60 PIC1.61 PIC1.62 PIC1.63 PIC1.64 PIC_PROG_1.6 PIC_PROG_1.7 PIC_PROG_1.8 U1.1 U1.5 U1.7 U1.8 Vref_1.1

## Polygon pours and split planes (outlines as drawn)
+5 on Power (split plane): 4798.95,20.1 20.1,20.1 20.1,2882.44 4798.95,2882.44
+3V3 on Power (split plane): 5424.9,20.1 4811.05,20.1 4811.05,2885.57 4811.55,2886.22 4812.31,2888.04 4812.56,2890 4812.31,2891.96 4811.55,2893.78 4810.35,2895.35 4808.78,2896.55 4806.96,2897.31 4805,2897.56 20.1,2897.56 20.1,4345.9 5424.9,4345.9
GND_H on Ground (split plane): 4798.95,20.1 20.1,20.1 20.1,2882.44 4798.95,2882.44
GND_L on Ground (split plane): 5424.9,20.1 4811.05,20.1 4811.05,2885.57 4811.55,2886.22 4812.31,2888.04 4812.56,2890 4812.31,2891.96 4811.55,2893.78 4810.35,2895.35 4808.78,2896.55 4806.96,2897.31 4805,2897.56 20.1,2897.56 20.1,4345.9 5424.9,4345.9

## Other copper
Power (plane layer: these items are gaps in the copper):
  lines w12: 4805,8.94 4805,2890
  lines w15: 0,2890 4805,2890
Ground (plane layer: these items are gaps in the copper):
  lines w12: 4805,8.94 4805,2890
  lines w15: 0,2890 4805,2890